# EAGLE board obd25k80 (EAGLE 9.6.2)
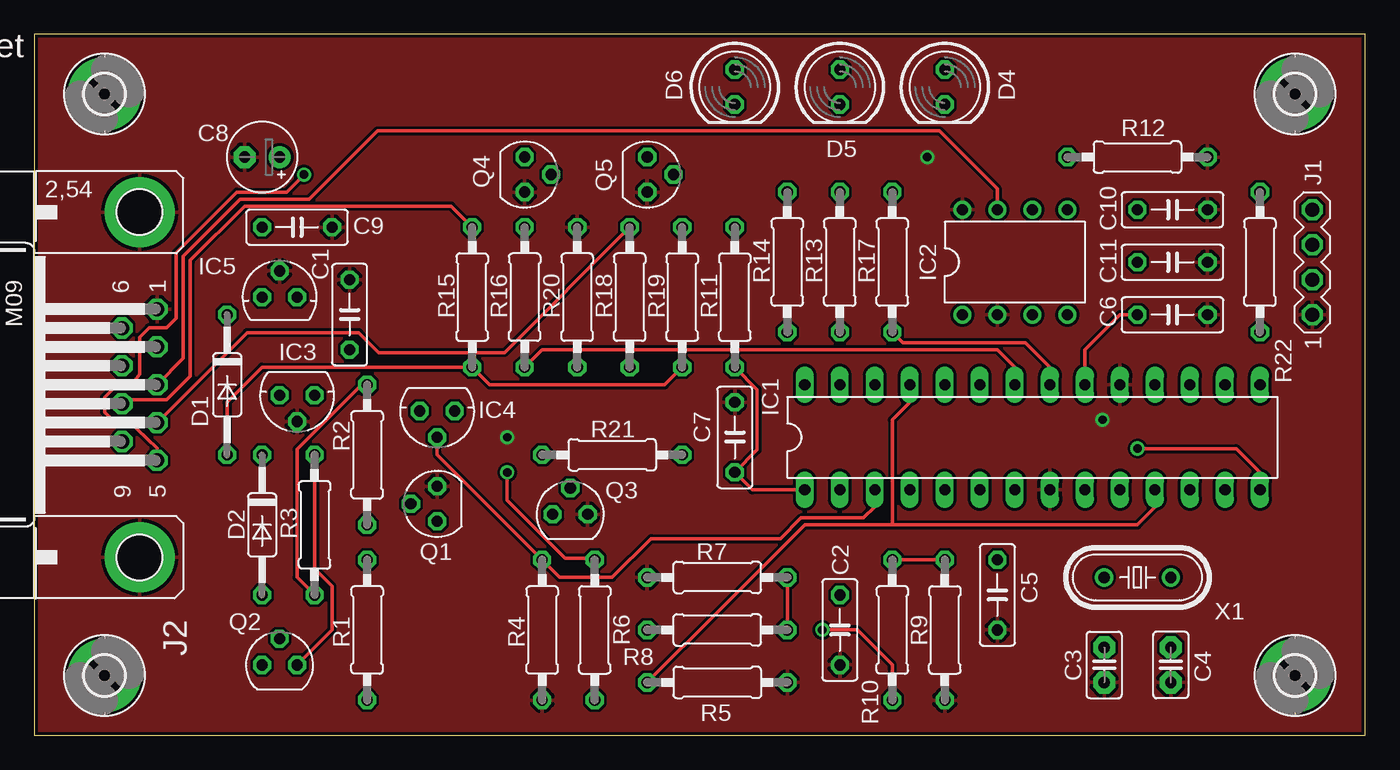
[diagram p0: board, top side]
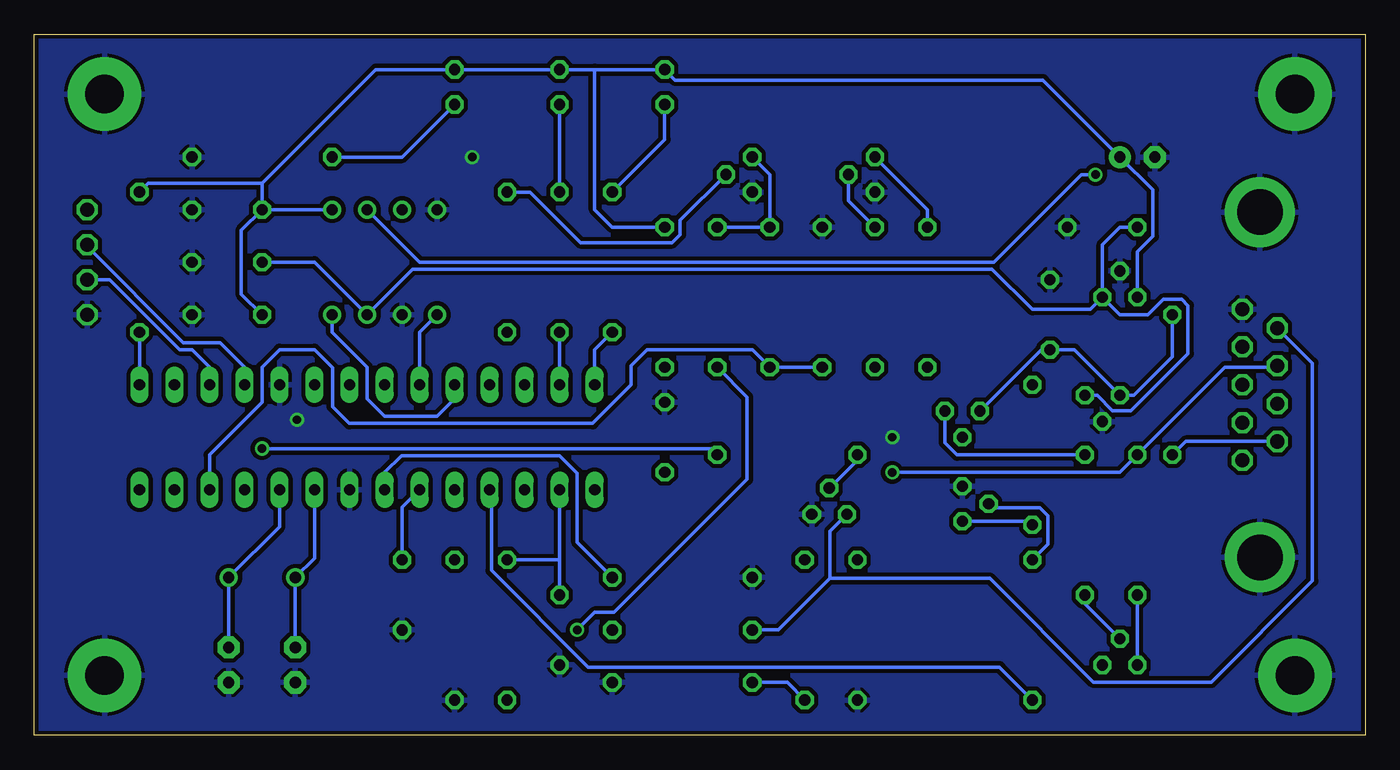
[diagram p1: board, bottom side, seen from below]

Size 96.52 x 50.8 mm. Coordinates in mm from the lower left corner, seen from the top.
Outline: 0,0 96.52,0 96.52,50.8 0,50.8 0,0
Copper layers (1*16): Top 0.035mm / dielectric 1.5mm / Bottom 0.035mm
Design rules "default *": minimum track width 10mil, minimum drill 24mil, track to track 8mil, track to pad 8mil, pad to pad 5mil, via to via 8mil, smd to smd 5mil, copper to edge 10mil, drill to drill 8mil, minimum pad ring 10mil, minimum via ring 8mil, stop-mask expansion 4mil, vias tented up to drill 0mil, thermal gap 10mil

## Footprints (pad centres in the part's own frame; a part is rotated, then mirrored left to right if it is on the bottom)
C050-025X075 = drill 0.813 octagon: 1 -2.54,0; 2 2.54,0
C2.5-2 = drill 0.813 pad 1.6 octagon: 1 -1.27,0; 2 1.27,0
E2,5-5 = drill 0.813 pad 1.6: + -1.27,0 | drill 0.813 pad 1.6 octagon: - 1.27,0
D035-10M = drill 0.813 octagon: A 5.08,0; C -5.08,0
LED5MM = drill 0.813 octagon: A -1.27,0; K 1.27,0
2,8-PAD = drill 2.8 pad 5.334: B2,8 0,0
DIL28 = drill 0.813 long: 1 -16.51,-3.81; 2 -13.97,-3.81; 3 -11.43,-3.81; 4 -8.89,-3.81; 5 -6.35,-3.81; 6 -3.81,-3.81; 7 -1.27,-3.81; 8 1.27,-3.81; 9 3.81,-3.81; 10 6.35,-3.81; 11 8.89,-3.81; 12 11.43,-3.81; 13 13.97,-3.81; 14 16.51,-3.81; 15 16.51,3.81; 16 13.97,3.81; 17 11.43,3.81; 18 8.89,3.81; 19 6.35,3.81; 20 3.81,3.81; 21 1.27,3.81; 22 -1.27,3.81; 23 -3.81,3.81; 24 -6.35,3.81; 25 -8.89,3.81; 26 -11.43,3.81; 27 -13.97,3.81; 28 -16.51,3.81
DIL8 = drill 0.813 pad 1.27: 1 -3.81,-3.81; 2 -1.27,-3.81; 3 1.27,-3.81; 4 3.81,-3.81; 5 3.81,3.81; 6 1.27,3.81; 7 -1.27,3.81; 8 -3.81,3.81
78LXX = drill 0.813 octagon: GND 0,1.905; IN 1.27,0; OUT -1.27,0
MA04-1 = drill 1.016 octagon: 1 -3.81,0; 2 -1.27,0; 3 1.27,0; 4 3.81,0
M09HP = drill 1.016 octagon: 1 -5.486,1.27; 2 -2.743,1.27; 3 0,1.27; 4 2.743,1.27; 5 5.486,1.27; 6 -4.115,-1.27; 7 -1.372,-1.27; 8 1.372,-1.27; 9 4.115,-1.27 | drill 3.302 pad 5.08: G1 -12.522,0; G2 12.522,0
SOT54A = drill 0.813 octagon: B 0,1.905; C -1.27,0; E 1.27,0
0207/10 = drill 0.813 octagon: 1 -5.08,0; 2 5.08,0
HC49/S = drill 0.813: 1 -2.413,0; 2 2.413,0

## Placement (x,y rotation side)
C1  100nF  [C050-025X075]  22.86,30.48 90 top
C2  100nF  [C050-025X075]  58.42,7.62 270 top
C3  27pF  [C2.5-2]  77.6,5.08 90 top
C4  27pF  [C2.5-2]  82.42,5.08 270 top
C5  100nF  [C050-025X075]  69.85,10.16 270 top
C6  100nF  [C050-025X075]  82.55,30.48 0 top
C7  100nF  [C050-025X075]  50.8,21.59 90 top
C8  1.5uF  [E2,5-5]  16.51,41.91 180 top
C9  100nF  [C050-025X075]  19.05,36.83 0 top
C10  100nF  [C050-025X075]  82.55,38.1 0 top
C11  100nF  [C050-025X075]  82.55,34.29 0 top
D1  1N4148  [D035-10M]  13.97,25.4 270 top
D2  1N4148  [D035-10M]  16.51,15.24 270 top
D4  [LED5MM]  66.04,46.99 270 top
D5  [LED5MM]  58.42,46.99 270 top
D6  [LED5MM]  50.8,46.99 270 top
H1  MOUNT-PAD-ROUND2.8  [2,8-PAD]  5.08,4.32 0 top
H2  MOUNT-PAD-ROUND2.8  [2,8-PAD]  5.08,46.48 0 top
H3  MOUNT-PAD-ROUND2.8  [2,8-PAD]  91.44,4.32 0 top
H4  MOUNT-PAD-ROUND2.8  [2,8-PAD]  91.44,46.48 0 top
IC1  PIC18F25K80  [DIL28]  72.39,21.59 0 top
IC2  MCP2562  [DIL8]  71.12,34.29 0 top
IC3  78L05  [78LXX]  19.05,24.64 180 top
IC4  78L05  [78LXX]  29.21,23.5 180 top
IC5  LE33CZ  [78LXX]  17.78,31.75 0 top
J1  MA04-1  [MA04-1]  92.71,34.29 90 top
J2  DB9-M  [M09HP]  7.62,25.4 270 top
Q1  BC547  [SOT54A]  29.21,16.76 90 top
Q2  BC557  [SOT54A]  17.78,5.08 0 top
Q3  BC547  [SOT54A]  38.86,16 0 top
Q4  BC547  [SOT54A]  35.56,40.64 270 top
Q5  BC547  [SOT54A]  44.45,40.64 270 top
R1  4.7K  [0207/10]  24.13,7.62 90 top
R2  4.7K  [0207/10]  24.13,20.32 90 top
R3  10K  [0207/10]  20.32,15.24 90 top
R4  10K  [0207/10]  36.83,7.62 90 top
R5  15K  [0207/10]  49.53,3.81 180 top
R6  22K  [0207/10]  40.64,7.62 270 top
R7  15K  [0207/10]  49.53,11.43 0 top
R8  22K  [0207/10]  49.53,7.62 0 top
R9  10K  [0207/10]  66.04,7.62 270 top
R10  47K  [0207/10]  62.23,7.62 90 top
R11  10K  [0207/10]  50.8,31.75 270 top
R12  330  [0207/10]  80.01,41.91 180 top
R13  330  [0207/10]  58.42,34.29 90 top
R14  330  [0207/10]  54.61,34.29 90 top
R15  510  [0207/10]  31.75,31.75 270 top
R16  2.2K  [0207/10]  35.56,31.75 90 top
R17  2.2K  [0207/10]  62.23,34.29 90 top
R18  47K  [0207/10]  43.18,31.75 90 top
R19  510  [0207/10]  46.99,31.75 270 top
R20  22K  [0207/10]  39.37,31.75 90 top
R21  4.7K  [0207/10]  41.91,20.32 180 top
R22  10K  [0207/10]  88.9,34.29 90 top
X1  4Mhz  [HC49/S]  80.01,11.43 180 top

## Library data of the parts
C1 C2 C5-C7 C9-C11 = rcl; SPICEPREFIX: C
C3 C4 = capacitor-wima
C8 R1-R22 = rcl
D1 D2 = diode
D4-D6 = led
H1-H4 = holes
IC1 = pic18f2455
IC2 J1 = obddiag-net
IC3-IC5 = v-reg
J2 = con-subd
Q1-Q5 = transistor-small-signal
X1 = crystal

## Nets
+3V3: C6.1 C8.+ C10.1 D4.A D5.A D6.A IC1.20 IC2.5 IC5.OUT R11.1 R22.2
+5V: C9.1 C11.1 IC2.3 IC3.OUT IC5.IN
+12V: C1.1 D1.C IC3.IN IC4.IN
CAN-H: IC2.7 J2.3
CAN-L: IC2.6 J2.5
GND: C1.2 C2.2 C3.1 C4.2 C5.2 C6.2 C7.2 C8.- C9.2 C10.2 C11.2 H1.B2,8 H2.B2,8 H3.B2,8 H4.B2,8 IC1.8 IC1.19 IC2.2 IC2.8 IC3.GND IC5.GND J1.1 J2.1 J2.G1 J2.G2 Q1.E Q3.E Q4.E Q5.E R4.1 R5.1 R7.1 R9.2 R12.1 R20.2
ISO-K: J2.4 Q5.C R18.2 R19.1
ISO-L: J2.8 Q4.C R15.1
J1850+: D2.C J2.7 R6.1
J1850-: J2.6 Q3.C R8.1
J+DIV: IC1.11 IC1.25 R5.2 R6.2
N$1: D4.K R12.2
N$2: IC1.28 R14.1
N$3: IC1.15 R22.1
N$6: D5.K R13.2
N$7: C7.1 IC1.1 R11.2
N$9: IC1.22 R16.1
N$10: D6.K R14.2
N$11: IC1.27 R13.1
N$14: C5.1 IC1.6
N$15: Q4.B R16.2
N$16: IC1.18 J1.3
N$17: IC1.24 IC2.4
N$18: IC1.17 J1.2
N$20: IC1.21 R17.1
N$21: C3.2 IC1.9 X1.2
N$22: Q3.B R21.2
N$23: IC1.23 IC2.1
N$24: Q5.B R17.2
N$25: Q1.C R2.1
N$26: C2.1 IC1.2 R9.1 R10.2
N$28: Q1.B R1.2
N$30: Q2.B R2.2 R3.1
N$31: IC4.OUT Q2.E R3.2
N$32: D2.A Q2.C
N$41: C4.1 IC1.10 X1.1
RA1: IC1.3 IC4.GND R4.2
RA2: IC1.4 R1.1
RA5: IC1.7 R7.2 R8.2
RC1: IC1.12 R18.1 R20.1
RC3: IC1.14 R21.1
V+: D1.A J2.9 R10.1 R15.2 R19.2

## Tracks (layer width: path | path; a pad name or v marks a point on that pad's centre or on a via)
+3V3
  Top 0.254: IC1.20 76.2,27.94 78.74,30.48 C6.1
  Bottom 0.254: C10.1 IC2.5 | 55.88,48.26 D5.A D4.A 71.75,48.26 80.01,40.01 | 55.88,48.26 D6.A 50.04,47.5 23.37,47.5 C8.+ 15.39,39.52 15.39,36.17 16.51,35.05 IC5.OUT | R11.1 54.61,36.83 55.88,38.1 55.88,48.26 | C10.1 81.51,36.6 81.51,31.98 C6.1 | 80.01,40.01 C10.1 | 80.01,38.23 C10.1 | R22.2 88.27,40.01 80.01,40.01
+5V
  Bottom 0.254: C11.1 76.2,34.29 IC2.3 69.09,33.78 27.05,33.78 24.13,30.86 19.94,30.86 IC5.IN | IC5.IN 19.05,35.56 17.78,36.83 C9.1 | IC3.OUT 19.43,24.64 18.32,23.52 16.99,23.52 12.85,27.66 12.85,31.14 13.31,31.6 14.63,31.6 15.75,30.48 17.78,30.48 IC5.IN
+12V
  Bottom 0.254: D1.C 13.97,27.43 16.76,24.64 IC3.IN 21.08,27.94 C1.1 23.5,27.94 IC4.IN
CAN-H
  Top 0.254: IC2.7 69.85,39.62 65.66,43.81 24.89,43.81 19.93,38.86 14.94,38.86 10.79,34.72 10.79,27.3 J2.3
CAN-L  (via drill 0.61)
  Top 0.254: J2.5 8.89,20.8 6.73,22.86 5.64,22.86 5.08,23.42 5.08,24.48 5.97,25.38 7.01,25.38 7.62,26.17 7.62,28.85 8.31,29.54 9.6,29.54 10.29,30.23 10.29,34.99 14.67,39.37 18.29,39.37 v19.56,40.64
  Bottom 0.254: IC2.6 68.58,34.29 26.92,34.29 20.57,40.64 v19.56,40.64
GND  (via drill 0.61)
  other vias: 34.29,21.59 77.47,22.86 64.77,41.91
  pour Bottom (isolate 0.305): 0,50.8 96.52,50.8 96.52,49.53 96.52,0 0,0 0,1.27
  pour Top: 0,0 0,50.8 96.52,50.8 96.52,0
ISO-K
  Top 0.254: R18.2 34.09,27.74 24.97,27.74 23.52,29.18 15.42,29.18 J2.4
  Bottom 0.254: R19.1 R18.2 43.18,40.64 Q5.C
ISO-L
  Top 0.254: J2.8 6.63,24.31 9.6,24.31 11.3,26.01 11.3,34.29 11.3,34.31 11.3,34.42 15.24,38.35 30.23,38.35 R15.1
  Bottom 0.254: R15.1 31.75,38.1 Q4.C
J1850+  (via drill 0.61)
  Top 0.254: R6.1 40.51,12.83 38.48,12.83 34.29,17.02 v34.29,19.05
  Bottom 0.254: v34.29,19.05 17.78,19.05 D2.C 10.16,26.67 6.45,26.67 J2.7
J1850-
  Bottom 0.254: J2.6 3.81,26.98 3.81,11.18 11.15,3.83 19.7,3.83 27.22,11.35 38.81,11.35 | Q3.C 38.81,14.79 38.81,11.35 | R8.1 42.54,7.62 38.81,11.35
J+DIV
  Top 0.254: R5.2 49.53,8.89 55.88,15.24 62.23,15.24 | IC1.11 81.28,16.51 80.01,15.24 62.23,15.24 | 62.23,15.24 62.23,22.86 63.5,24.13 IC1.25
  Bottom 0.254: R6.2 41.91,3.81 R5.2
N$1
  Bottom 0.254: R12.2 69.85,41.91 D4.K
N$2
  Bottom 0.254: IC1.28 55.88,27.94 R14.1
N$3
  Bottom 0.254: R22.1 IC1.15
N$6
  Bottom 0.254: R13.2 D5.K
N$7
  Top 0.254: IC1.1 52.07,17.78 C7.1 52.43,20.68 52.43,25.04 R11.2
N$9
  Top 0.254: IC1.22 71.12,26.67 69.85,27.94 36.83,27.94 R16.1
N$10
  Bottom 0.254: R14.2 50.8,43.18 D6.K
N$11
  Bottom 0.254: IC1.27 R13.1
N$14
  Bottom 0.254: IC1.6 69.85,16.51 C5.1
N$15
  Bottom 0.254: R16.2 37.47,38.73 Q4.B
N$16
  Bottom 0.254: J1.3 92.71,35.43 85.72,28.45 83.06,28.45 81.28,26.67 IC1.18
N$17
  Bottom 0.254: IC2.4 74.93,29.21 72.39,26.67 72.39,24.38 71.12,23.11 67.31,23.11 66.04,24.38 IC1.24
N$18
  Bottom 0.254: J1.2 91.06,33.02 85.98,27.94 85.09,27.94 83.82,26.67 IC1.17
N$20
  Top 0.254: IC1.21 73.66,26.67 71.88,28.45 62.99,28.45 R17.1
N$21  (via drill 0.61)
  Top 0.254: v77.6,6.48 C3.2
  Bottom 0.254: IC1.9 76.2,12.83 X1.2 v77.6,6.48
N$22
  Bottom 0.254: Q3.B 36.83,19.94 R21.2
N$23
  Bottom 0.254: IC1.23 68.58,29.21 IC2.1
N$24
  Bottom 0.254: R17.2 60.58,39.37 56.92,35.71 50.26,35.71 49.68,36.29 49.68,37.31 Q5.B
N$25
  Bottom 0.254: R2.1 24.38,15.49 Q1.C
N$26
  Top 0.254: R10.2 R9.1
  Bottom 0.254: IC1.2 58.42,12.7 | 58.42,12.7 C2.1 | R10.2 58.42,12.7
N$28
  Bottom 0.254: Q1.B 27.03,16.48 23.59,16.48 23.01,15.9 23.01,13.82 R1.2
N$30
  Top 0.254: R3.1 19.05,11.43 19.05,20.7 23.75,25.4 R2.2
  Bottom 0.254: Q2.B 20.32,9.53 R3.1
N$31
  Top 0.254: Q2.E 21.59,7.62 21.59,10.79 20.32,12.06 R3.2
  Bottom 0.254: IC4.OUT 30.48,21.2 29.59,20.32 R3.2
N$32
  Bottom 0.254: Q2.C D2.A
N$41  (via drill 0.61)
  Top 0.254: v82.42,6.48 C4.1
  Bottom 0.254: v82.42,6.48 X1.1 78.74,15.11 IC1.10
RA1
  Top 0.254: IC1.3 60.96,16.56 60.15,15.75 55.61,15.75 54.12,14.25 44.73,14.25 41.91,11.43 38.1,11.43 R4.2 29.21,20.32 IC4.GND
RA2
  Bottom 0.254: R1.1 26.52,4.93 56.36,4.93 63.37,11.94 63.37,17.65 IC1.4
RA5
  Top 0.254: R7.2 R8.2
  Bottom 0.254: 54.61,11.3 R7.2 | 54.65,11.39 R7.2 | IC1.7 71.12,19.05 69.9,20.27 58.42,20.27 57.15,19 57.15,13.97 R7.2
RC1
  Bottom 0.254: R20.1 R18.1 44.45,27.94 52.07,27.94 53.24,26.77 53.24,25.4 56.03,22.61 73.69,22.61 74.91,23.82 74.91,26.64 76.2,27.94 78.74,27.94 80.01,26.67 80.01,24.13 83.82,20.32 IC1.12
RC3  (via drill 0.61)
  Top 0.254: v80.01,20.78 87.17,20.78 88.9,19.05 IC1.14
  Bottom 0.254: R21.1 47.45,20.78 v80.01,20.78
V+  (via drill 0.61)
  Top 0.254: D1.A 13.97,24.13 16.51,26.67 R15.2 33.02,25.4 45.72,25.4 R19.2 | R10.1 62.23,5.08 59.69,7.62 v57.15,7.62
  Bottom 0.254: J2.9 13.01,21.29 D1.A | R19.2 44.83,24.51 44.83,18.54 54.48,8.89 55.88,8.89 v57.15,7.62

## Text on the board
tNames: ObdDiag.Net